# EAGLE board Cálculo do IMC (Índice de Massa Corporal) (EAGLE 7.6.0)

Size 73.58 x 101.49 mm. Coordinates in mm from the lower left corner, seen from the top.
Outline: 0,0 56.82,0 56.82,53.33 0,53.33 0,0
Copper layers (1*16): Top 0.035mm / dielectric 1.5mm / Bottom 0.035mm
Design rules "default": minimum track width 10mil, minimum drill 24mil, track to track 8mil, track to pad 8mil, pad to pad 8mil, via to via 8mil, smd to smd 8mil, copper to edge 40mil, drill to drill 8mil, minimum pad ring 10mil, minimum via ring 8mil, stop-mask expansion 4mil, vias tented up to drill 0mil, thermal gap 10mil

## Footprints (pad centres in the part's own frame; a part is rotated, then mirrored left to right if it is on the bottom)
LED5MM = drill 0.813 octagon: A -1.27,0; K 1.27,0
1X8P-2.54-2.54-11.6-3.0-BLACK-MALE = drill 0.889 pad 1.651 square: 1 0,8.89 | drill 0.889 pad 1.651: 2 0,6.35; 3 0,3.81; 4 0,1.27; 5 0,-1.27; 6 0,-3.81; 7 0,-6.35; 8 0,-8.89
0207/10 = drill 0.813 octagon: 1 -5.08,0; 2 5.08,0
ARDUINO_UNO = drill 1.016 pad 1.88: 0 63.5,50.8; 1 60.96,50.8; 2 58.42,50.8; 3 55.88,50.8; 3.3V 35.56,2.54; 4 53.34,50.8; 5 50.8,50.8; 5V 38.1,2.54; 6 48.26,50.8; 7 45.72,50.8; 8 41.656,50.8; 9 39.116,50.8; 10 36.576,50.8; 11 34.036,50.8; 12 31.496,50.8; 13 28.956,50.8; A0 50.8,2.54; A1 53.34,2.54; A2 55.88,2.54; A3 58.42,2.54; A4 60.96,2.54; A5 63.5,2.54; AREF 23.876,50.8; GND 26.416,50.8; GND. 43.18,2.54; GND.. 40.64,2.54; I/OREF 30.48,2.54; N/C 27.94,2.54; RESET 33.02,2.54; SCL 18.796,50.8; SDA 21.336,50.8; VIN 45.72,2.54 | hole 3.2: 66.04,7.62; 66.04,35.56; 15.24,50.8; 13.97,2.54
1X16P-2.54-2.54-11.6-3.0-BLACK-MALE = drill 0.889 pad 1.651 square: 1 0,19.05 | drill 0.889 pad 1.651: 2 0,16.51; 3 0,13.97; 4 0,11.43; 5 0,8.89; 6 0,6.35; 7 0,3.81; 8 0,1.27; 9 0,-1.27; 10 0,-3.81; 11 0,-6.35; 12 0,-8.89; 13 0,-11.43; 14 0,-13.97; 15 0,-16.51; 16 0,-19.05

## Placement (x,y rotation side)
D1  [LED5MM]  5,111.68 0 top  (outside the outline)
D2  [LED5MM]  5,124.38 0 top  (outside the outline)
D3  [LED5MM]  5,137.08 0 top  (outside the outline)
KEYPAD1  [1X8P-2.54-2.54-11.6-3.0-BLACK-MALE]  5,98.98 0 top
R1  330‎Ω  [0207/10]  5,35.48 0 top
R2  330‎Ω  [0207/10]  5,60.88 0 top
R3  330‎Ω  [0207/10]  5,73.58 0 top
R4  330‎Ω  [0207/10]  5,86.28 0 top
R5  330‎Ω  [0207/10]  5,149.78 0 top  (outside the outline)
U1  [ARDUINO_UNO]  5,10.08 0 top
U2  [1X16P-2.54-2.54-11.6-3.0-BLACK-MALE]  5,22.78 0 top
U3  [ARDUINO_UNO]  5,48.18 0 top

## Library data of the parts
D1-D3 KEYPAD1 R1-R5 U1-U3 = AUTODESK_CIRCUITS_BREADBOARD

## Nets
N$1: R1.1 U2.16
N$2: U1.5V U2.2 U2.15
N$3: U1.2 U2.4
N$4: U1.3 U2.6
N$5: U1.4 U2.11
N$6: U1.5 U2.12
N$7: U1.6 U2.13
N$8: U1.7 U2.14
N$9: U1.GND. U3.GND..
N$10: U1.A4 U3.A4
N$11: U1.A5 U3.A5
N$12: KEYPAD1.1 U3.9
N$13: KEYPAD1.2 U3.8
N$14: KEYPAD1.3 U3.7
N$15: KEYPAD1.4 U3.6
N$16: KEYPAD1.5 U3.5
N$17: KEYPAD1.6 U3.4
N$18: KEYPAD1.7 U3.3
N$19: KEYPAD1.8 U3.2
N$20: R5.1 U1.GND
N$21: D1.A R2.1
N$22: R2.2 U1.10
N$23: D2.A R3.1
N$24: R3.2 U1.9
N$25: D3.A R4.1
N$26: R4.2 U1.8
N$27: R1.2 U1.GND.. U2.1 U2.3 U2.5
N$28: D1.K D2.K D3.K R5.2

## Tracks (layer width: path | path; a pad name or v marks a point on that pad's centre or on a via)
N$1  (1 unrouted)
N$2  (2 unrouted)
N$3  (1 unrouted)
N$4  (1 unrouted)
N$5  (1 unrouted)
N$6  (1 unrouted)
N$7  (1 unrouted)
N$8  (1 unrouted)
N$9  (1 unrouted)
N$10  (1 unrouted)
N$11  (1 unrouted)
N$12  (1 unrouted)
N$13  (1 unrouted)
N$14  (1 unrouted)
N$15  (1 unrouted)
N$16  (1 unrouted)
N$17  (1 unrouted)
N$18  (1 unrouted)
N$19  (1 unrouted)
N$20  (1 unrouted)
N$21  (1 unrouted)
N$22  (1 unrouted)
N$23  (1 unrouted)
N$24  (1 unrouted)
N$25  (1 unrouted)
N$26  (1 unrouted)
N$27  (4 unrouted)
N$28  (3 unrouted)